# Altium PCB PCB1.PcbDoc
Units mm, origin at the board's own origin, x right, y up, seen from the top; angles counter-clockwise.
Board outline 60 x 60 mm, 2 copper layers (Top Layer, Bottom Layer); 12 components, 7 nets, 32 pads, 0 vias.
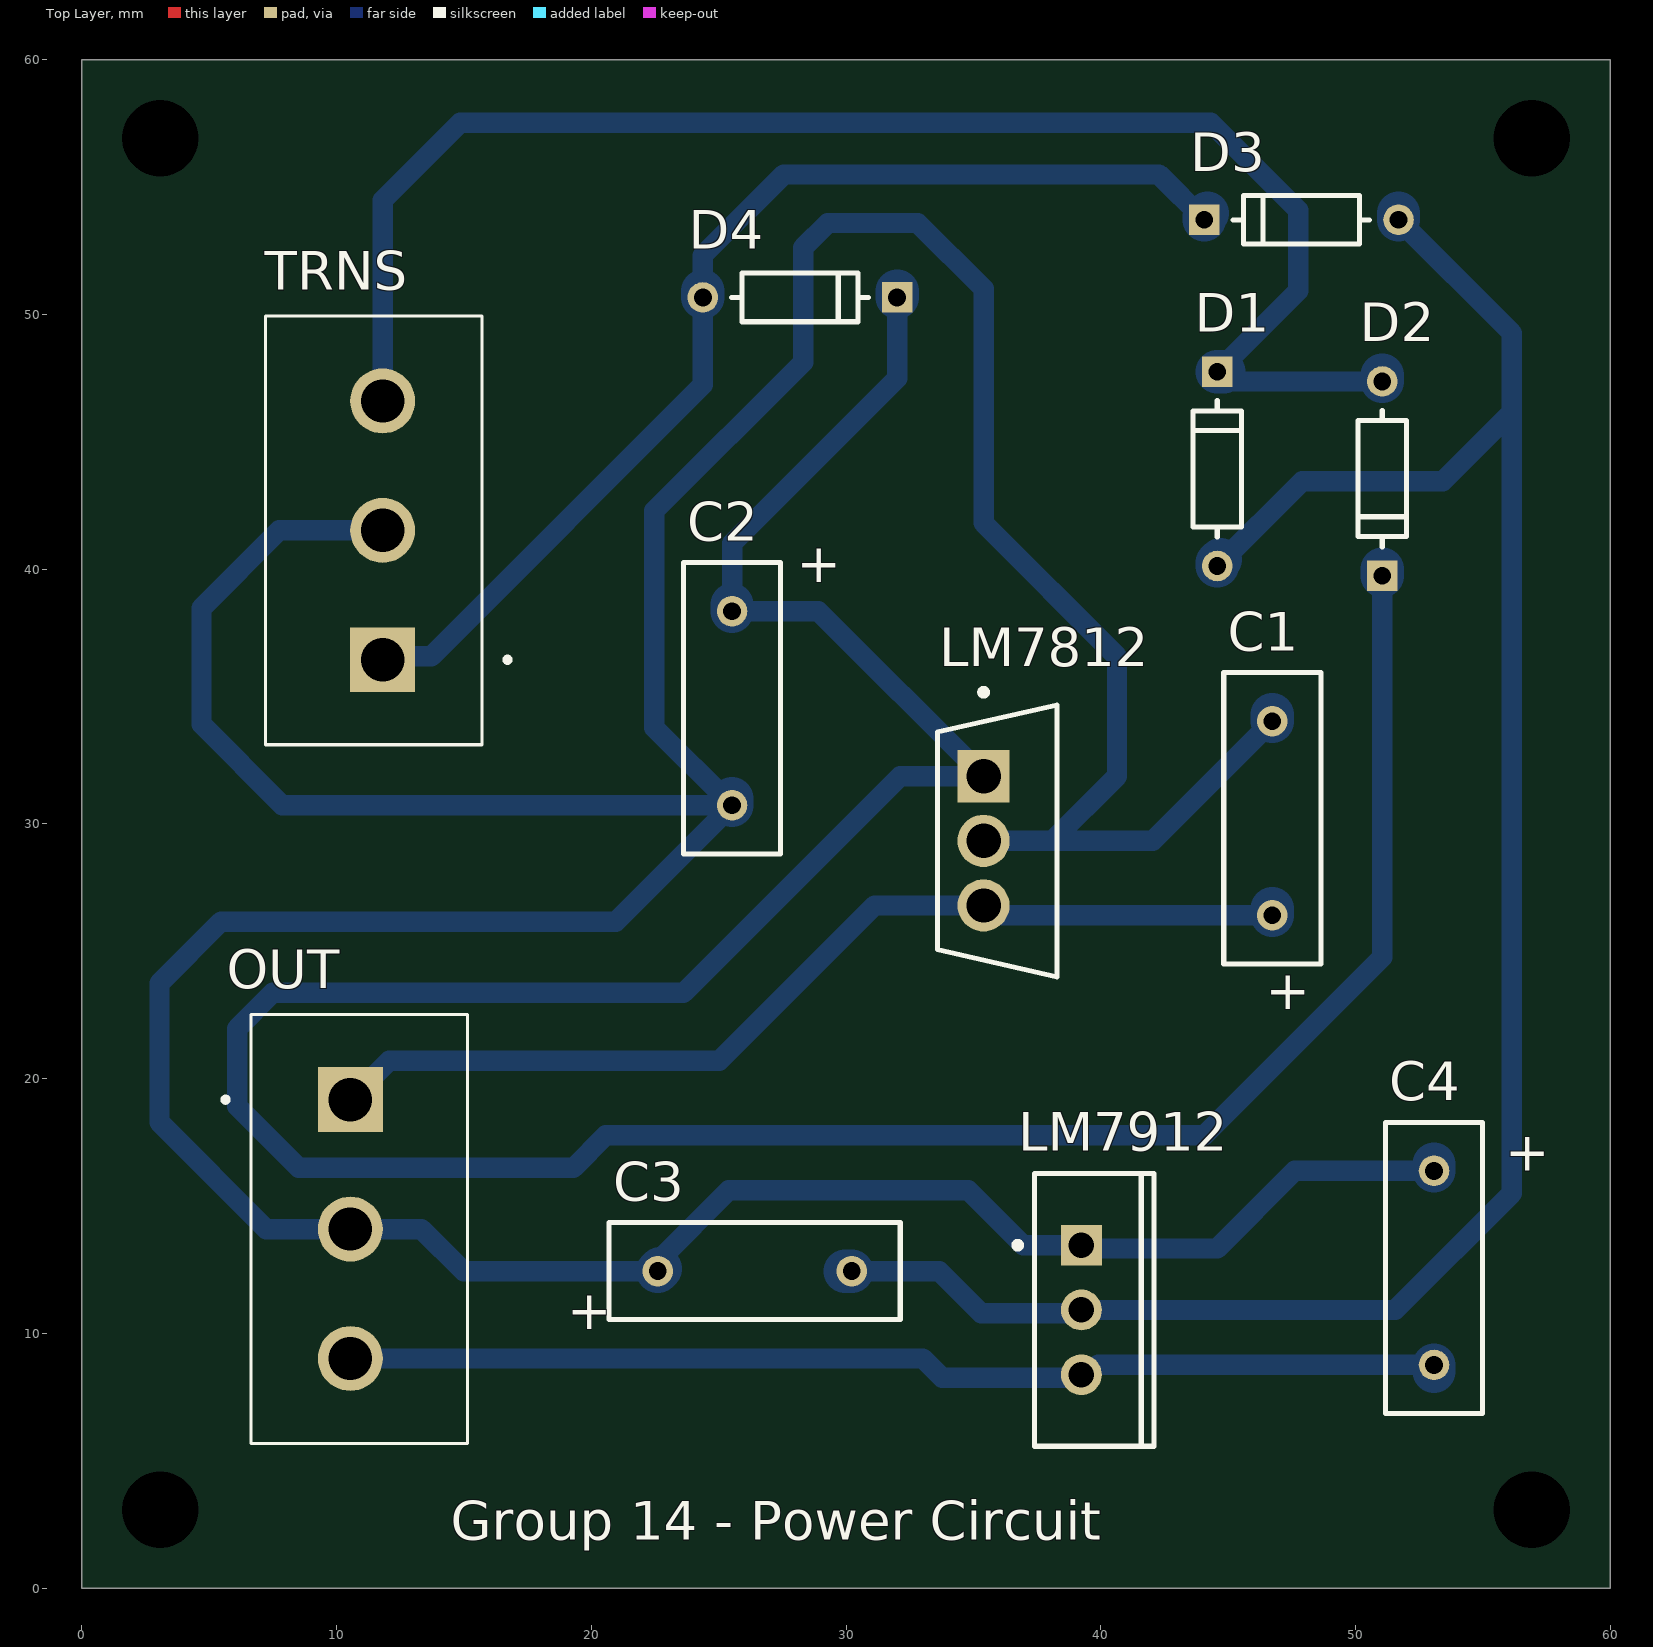
[diagram p0: Top Layer view]
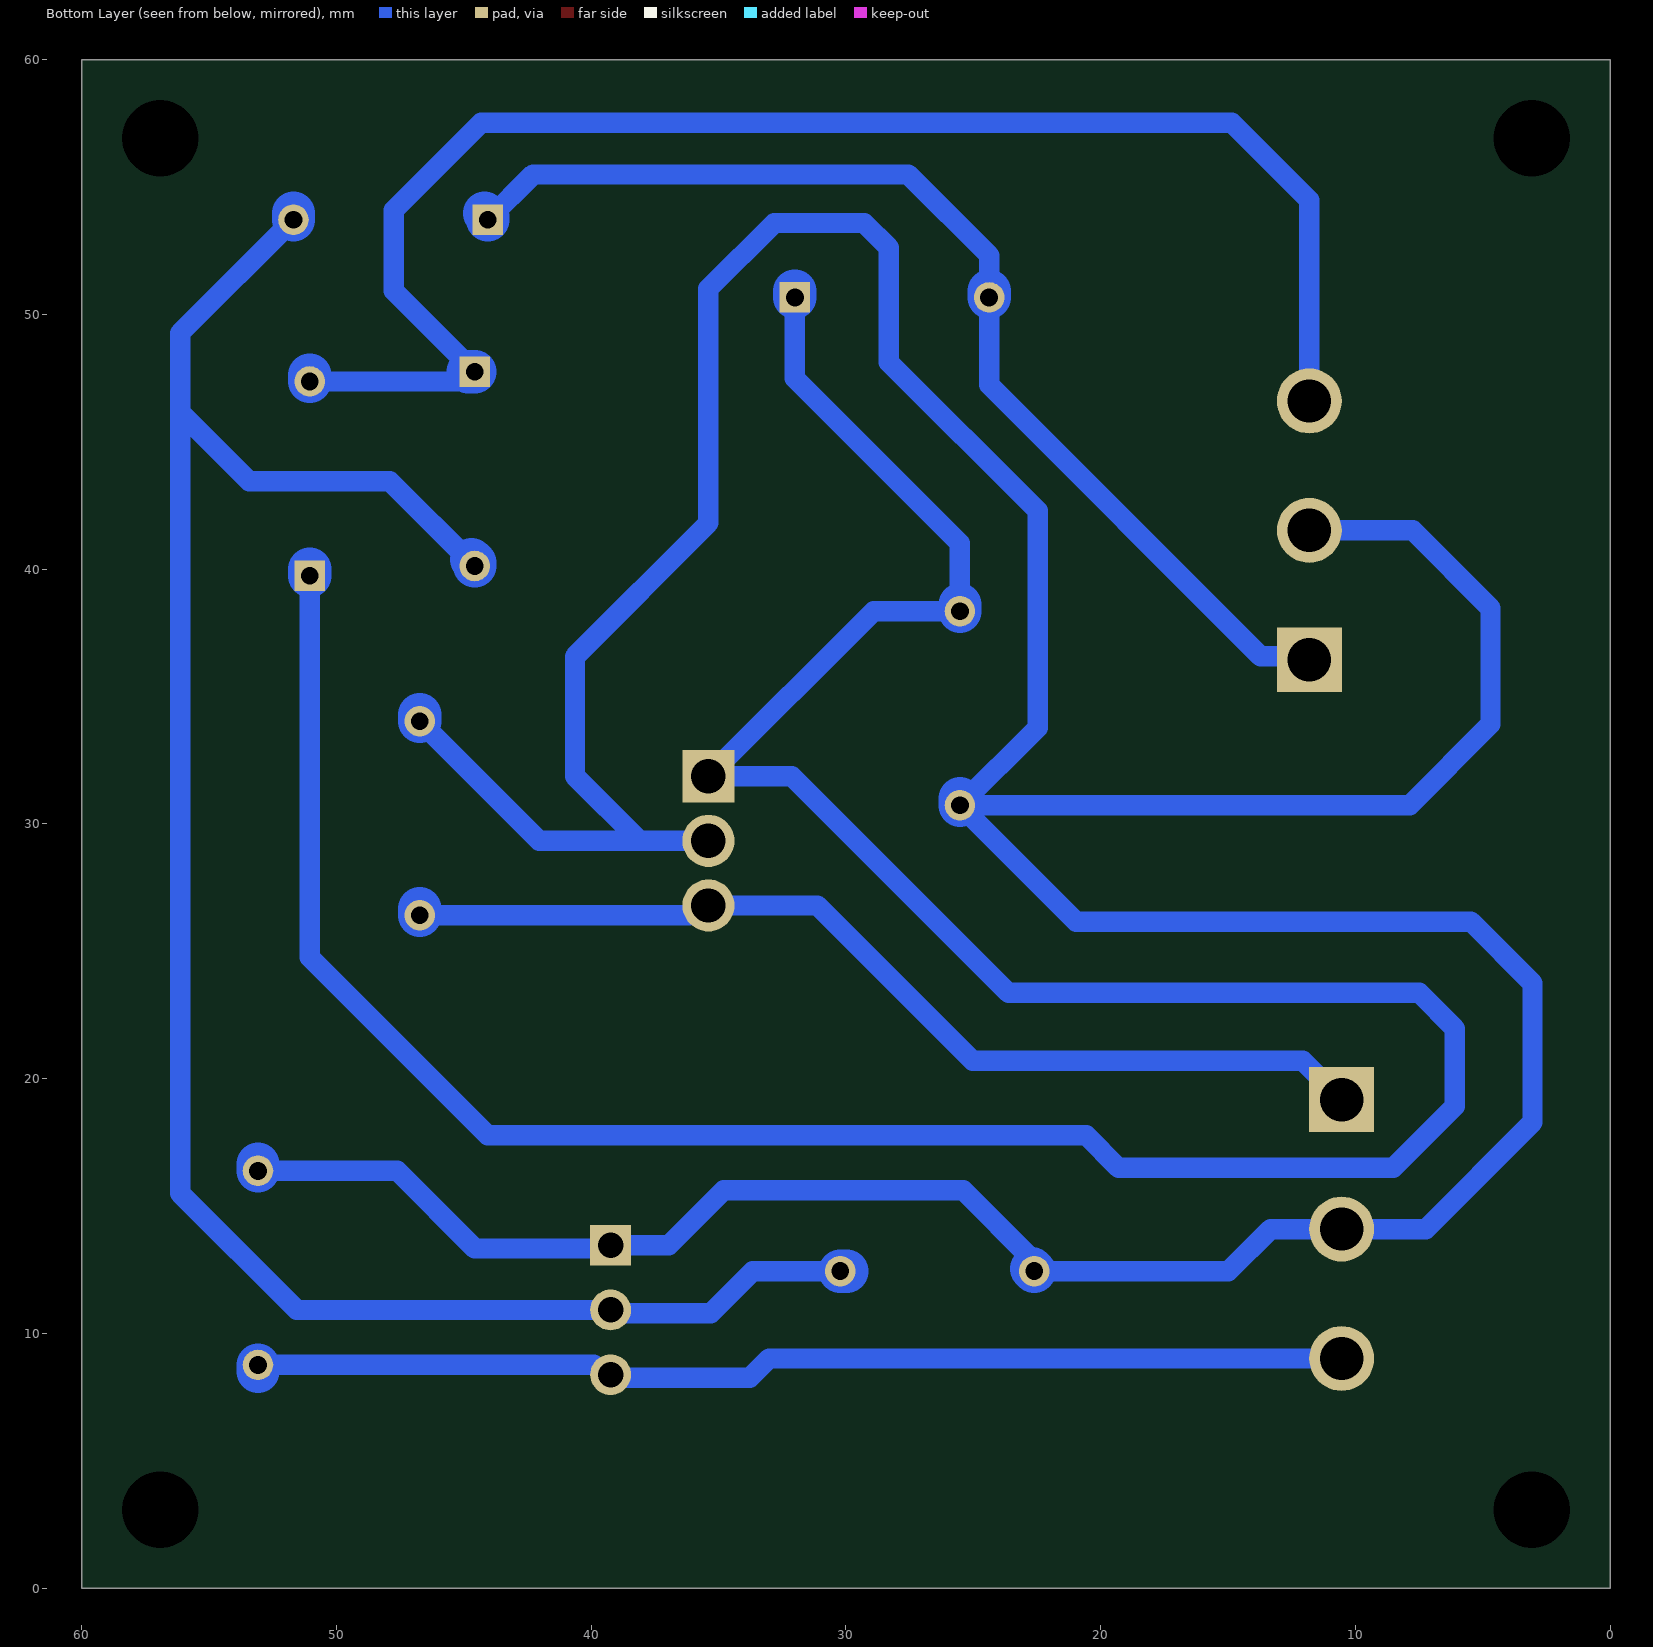
[diagram p1: Bottom Layer view, seen from below]

## Layer stack, top to bottom
Top Solder: solder mask 0.0102, Solder Resist, Dk 3.5
Top Layer: signal copper 0.0356
Dielectric 1: dielectric 0.32, FR-4, Dk 4.8
Bottom Layer: signal copper 0.0356
Bottom Solder: solder mask 0.0102, Solder Resist, Dk 3.5

## Board outline
0,0 60,0 60,60 0,60

## Design rules (kind name [scope] priority, off if disabled: settings)
Clearance [All] p1: gap=0.7 ignorepadtopadclearanceinfootprint=TRUE
PolygonConnect [All] p1: connectstyle=Relief reliefconductorwidth=0.254 reliefentries=4 polygonreliefangle="90 Angle" airgapwidth=0.254
RoutingVias [All] p1: holewidth=0.711 width=1.27 viastyle="Through Hole" minholewidth=0.711 minwidth=1.27 maxholewidth=0.711 maxwidth=1.27
SolderMaskExpansion [All] p1: expansion=0.102 istentingtop=FALSE
Width [All] p1: maxlimit=1.7 minlimit=0.254 preferedwidth=1.7 toplayer_maxwidth=0.8 toplayer_prefwidth=0.7 minimp=50.000000 maximp=50.000000 favimp=50.000000
30 further rules are at their usual default settings.

## Classes and differential pairs
component class schemetic: C2 C3 C4 D1 D2 D3 D4 LM7812 LM7912 TRNS

## Components (designator, comment, footprint, x,y, rotation, side; value= is the part's Value field where it differs from the comment)
C1 "Cap" RAD-0.3 46.736,30.226 r270 top value=1uF
C2 "Cap" RAD-0.3 25.527,34.544 r90 top value=10uF
C3 "Cap" RAD-0.3 26.416,12.446 r180 top value=10uF
C4 "Cap" RAD-0.3 53.086,12.573 r90 top value=1uF
D1 "1N4148" FP-017AG-MFG 44.577,43.942 r270 top
D2 "1N4148" FP-017AG-MFG 51.054,43.561 r90 top
D3 "1N4148" FP-017AG-MFG 47.879,53.721 r0 top
D4 "1N4148" FP-017AG-MFG 28.194,50.673 r180 top
LM7812 "LM7812CT" FP-TO220B03-MFG 35.941,29.337 r0 top
LM7912 "LM7912CT" NDE0003A 39.243,10.922 r270 top
OUT "" CUI_TBP01R2-508-03BE 10.541,19.177 r270 top
TRNS "" CUI_TBP01R2-508-03BE 11.811,36.449 r90 top

## Footprints (in the part's own frame and the unit in brackets; to place one, negate y for a bottom-side part, rotate by r counter-clockwise, add the part's x,y. Pads: shape width x height; smd on the part's side, far side on the other; paste and mask are expansions set on the pad)
CUI_TBP01R2-508-03BE [mm]
  rect 2.55x2.55 / inner round 2.55 / far side rect 2.55x2.55 hole 1.7: 1(0,0)
  round 2.55 hole 1.7: 2(5.08,0) 3(10.16,0)
  silkscreen extent -3.34,-5 13.5,4.6
FP-017AG-MFG [mm]
  rect 1.2x1.2 hole 0.7 paste-1000 mask+0: 1(-3.813,0)
  round 1.2 hole 0.7 paste-1000 mask+0: 2(3.813,0)
  silkscreen extent -2.68,-0.95 2.68,0.95, body extent -4.51,-1.05 4.51,1.05, height 0.25
FP-TO220B03-MFG [mm]
  rect 2.05x2.05 hole 1.35 paste-1000 mask+0: 1(-0.54,2.535)
  round 2.05 hole 1.35 paste-1000 mask+0: 2(-0.54,0) 3(-0.54,-2.535)
  silkscreen extent -2.35,-5.34 2.35,5.96, body extent -2.45,-5.44 2.45,5.44, height 0.25
NDE0003A [mm] "FM, 3-Leads, Body 10.7x4.7mm, Pitch 2.54mm"
  rect 1.6x1.6 hole 1: 1(-2.54,0)
  round 1.6 hole 1: 2(0,0) 3(2.54,0)
  silkscreen extent -5.35,-2.62 5.35,2.85, body extent -5.4,-1.9 5.4,2.9, height 19.4
RAD-0.3 [mm] "Radial Cap, Thru-Hole; 2 Leads; 0.3 in Pin Spacing"
  round 1.2 hole 0.7: 1(-3.81,0) 2(3.81,0)
  silkscreen extent -5.71,-1.91 5.71,1.91

## Part data
C1 C2 C3 C4: "Capacitor", LatestRevisionDate=17-Jul-2002, LatestRevisionNote="Re-released for DXP Platform.", PackageDescription="Radial Cap, Thru-Hole; 2 Leads; 0.3 in Pin Spacing", PackageReference=RAD-0.3, Published=8-Jun-2000, Publisher="Altium Limited"
D1 D2 D3 D4: library part CMP-07163-000046-1, "DIODE GEN PURP 100V 200MA DO35", Average Rectified Current=200mA, Capacitance=4pF, Case/Package=DO-35, Current=4A, Forward Current=300mA, Forward Voltage=1V, Max Forward Surge Current (Ifsm)=1A, Max Operating Temperature=175°C, Max Power Dissipation=500mW, Max Repetitive Reverse Voltage (Vrrm)=100V, Max Reverse Current=5uA, Min Operating Temperature=-65°C, Package Quantity=2000, Contact Plating=Tin, Current Rating=200mA, Diameter=1.91mm, Element Configuration=Single, Height=4.56mm, Lead Free="Lead Free", Length=4.56mm, Max Reverse Voltage (DC)=100V, Max Surge Current=4A, Mount="Through Hole", Number of Pins=2, Output Current=200mA, Outside Diameter=1.85mm, Packaging=Bulk, Peak Non-Repetitive Surge Current=4A, Polarity=Standard, Power Dissipation=500mW, Radiation Hardening=No, REACH SVHC="No SVHC", Recovery Time=4ns, Reverse Recovery Time=4ns, Reverse Voltage=100V, Series=-, Voltage=100V, Voltage Rating (DC)=100V, Weight=0.01lb, Width=1.91mm
LM7812: library part CMP-07128-000015-1, "IC REG LINEAR 12V 1A TO220-3", Dropout Voltage=2V, Manufacturer="ON Semiconductor", Max Supply Voltage=35V, Nominal Supply Current=5.1mA, Output Current=1A, Output Voltage=12V, Package=TO220B03, Temperature="-40°C to +125°C", Temperature Range High=+125°C, Temperature Range Low=-40°C, Accuracy Percentage=4%, Automotive=No, Category=IC, ComponentLink2Description=Datasheet, ComponentLink2URL=https://www.mouser.in/datasheet/2/308/LM7812-1125088.pdf, Device Class L1="Integrated Circuits (ICs)", Device Class L2="Power Management ICs", Device Class L3="Voltage Regulators - Linear", Digikey Description="IC REG LINEAR 12V 1A TO220-3", Height=20.4mm, Ipc Land Pattern Name=TO-220, Lead Free=Yes, Manufacturer Part Number=LM7812CT, Number Of Outputs=1, Obsolete Part=true, Octopart=https://octopart.com/lm7812ct-on+semiconductor-14383031, Output Type=Fixed, RoHS=TRUE, Standoff Height=2.7mm
LM7912: library part CMP-0062-02472-3, "3-Terminal Negative Regulator, 3-pin TO-220", Manufacturer="Texas Instruments", PackageTopMarking=NSUZXYTTE#*LM7912CT, PowerWise=N, ComponentLink1Description="Datasheet URL", ComponentLink1URL=http://www.ti.com/general/docs/lit/getliterature.tsp?genericPartNumber=LM7912&fileType=pdf, CompType="LDO IC", PackageDescription="TO-220, Molded, 3 Lead, Straight", PackageReference=NDE0003A, PinCount=3, RoHS=N
OUT TRNS: library part TBP01R2-508-03BE, Package=None, Availability=Unavailable, MF="{'manufacturer': u'CUI'}", MP=TBP01R2-508-03BE, Price=None

## Free pads (board coordinates)
  round 0 hole 3 unplated: 8(3.075,56.925) 9(56.925,56.925) 10(56.925,3.075) 11(3.075,3.075)

## Nets (pads, with @x,y where several pads share a name; then routed paths per layer and width w, separated by ;. In a path a pad name is that pad's centre, name@x,y a point inside that pad or via, vN(x,y) a via of type N, cw(c..) or ccw(c..) an arc to the next point about the centre after c; other vN are vias at no path point)
GND: C1.1 C2.1 C3.2 C4.2 LM7812.2 LM7912.1 OUT.2 TRNS.2 | length 195.2
  Bottom Layer w0.55: LM7912.1 LM7912.1@39.37,13.335
  Bottom Layer w0.8: TRNS.2 7.747,41.529 4.699,38.481 4.699,33.909 7.874,30.734 C2.1 ; C3.2 14.986,12.446 13.335,14.097 OUT.2 7.239,14.097 3.048,18.288 3.048,23.749 5.461,26.162 20.955,26.162 C2.1 ; C3.2@22.702,12.542 22.702,12.923 25.4,15.621 34.798,15.621 36.957,13.462 LM7912.1 ; LM7812.2 38.1,29.337 ; LM7912.1@39.37,13.335 44.577,13.335 47.625,16.383 C4.2 ; C1.1 42.037,29.337 38.1,29.337 ; C2.1 22.479,33.782 22.479,42.291 28.321,48.133 28.321,52.633 29.282,53.594 32.818,53.594 35.401,51.011 35.401,41.815 40.64,36.576 40.64,31.877 38.1,29.337
  Bottom Layer w1.7: C3.2 C3.2@22.702,12.542 ; C2.1 C2.1@25.527,30.988 ; C1.1 C1.1@46.736,34.29 ; C4.2 C4.2@53.086,16.637
NetC1_2: C1.2 LM7812.3 OUT.1 | length 39.8
  Bottom Layer w0.8: OUT.1 12.065,20.701 25.019,20.701 31.12,26.802 LM7812.3 35.766,26.802 36.152,26.416 C1.2
  Bottom Layer w1.7: C1.2 C1.2@46.736,26.67
NetC2_2: C2.2 D2.1 D4.1 LM7812.1 | length 128.9
  Bottom Layer w0.8: C2.2 28.919,38.354 LM7812.1 32.126,31.872 23.622,23.368 7.493,23.368 6.096,21.971 6.096,18.923 8.509,16.51 19.304,16.51 20.571,17.777 34.541,17.777 34.547,17.783 44.072,17.783 51.054,24.765 D2.1 ; C2.2@25.527,38.608 25.527,41.021 32.007,47.501 D4.1
  Bottom Layer w1.7: C2.2 C2.2@25.527,38.608 ; D4.1@32.004,50.927 32.007,50.924 D4.1 ; D2.1 D2.1@51.054,40.005
NetC3_1: C3.1 D1.2 D3.2 LM7912.2 | length 83.5
  Bottom Layer w0.55: LM7912.2@39.116,10.795 LM7912.2
  Bottom Layer w0.8: C3.1 33.655,12.446 35.306,10.795 LM7912.2@39.116,10.795 ; LM7912.2 51.562,10.922 56.134,15.494 56.134,46.168 ; D1.2 47.906,43.458 53.424,43.458 56.134,46.168 ; D3.2 56.134,49.279 56.134,46.168
  Bottom Layer w1.7: C3.1@29.972,12.446 C3.1 ; D1.2 44.577,40.259 D1.2@44.704,40.386 ; D3.2@51.689,53.975 51.692,53.972 D3.2
NetC4_1: C4.1 LM7912.3 OUT.3 | length 43.3
  Bottom Layer w0.55: LM7912.3@39.116,8.255 LM7912.3 39.527,8.382 LM7912.3@39.908,8.763
  Bottom Layer w0.8: OUT.3 33.02,9.017 33.782,8.255 LM7912.3@39.116,8.255 ; LM7912.3@39.908,8.763 C4.1
  Bottom Layer w1.7: C4.1@53.086,8.509 C4.1
NetD1_1: D1.1 D2.2 TRNS.3 | length 61.5
  Top Layer w0.55: D2.2@50.878,47.374 D2.2
  Bottom Layer w0.8: TRNS.3 11.811,54.483 14.859,57.531 44.323,57.531 47.752,54.102 47.752,50.93 D1.1 44.958,47.374 D2.2
  Bottom Layer w1.7: D1.1 44.828,47.755 D1.1@44.831,47.752 ; D2.2 D2.2@51.054,47.625
NetD3_1: D3.1 D4.2 TRNS.1 | length 44.2
  Bottom Layer w0.8: TRNS.1 11.948,36.586 13.726,36.586 24.381,47.241 D4.2 ; D4.2@24.381,50.924 24.381,52.321 27.559,55.499 42.288,55.499 D3.1
  Bottom Layer w1.7: D4.2 24.381,50.924 D4.2@24.384,50.927 ; D3.1 44.066,53.845 D3.1@44.196,53.975

## Silkscreen, mask and mechanical layers (free items; w line width, h text height)
Top Overlay:
  text "+" at 28.067,39.497 h1.52
  text "+" at 46.482,22.733 h1.52
  text "+" at 55.88,16.383 h1.52
  text "+" at 19.05,10.16 h1.52
  text "Group 14 - Power Circuit" at 14.478,1.905 h1.52